# Altium PCB Loaclization_Board_PCB.PcbDoc
Units mm, origin at the board's own origin, x right, y up, seen from the top; angles counter-clockwise.
Board outline 56.61 x 83.31 mm, 4 copper layers (Top Layer, GND, 3V3, Bottom Layer), stack 0.603 mm thick; 26 components, 18 nets, 165 pads, 34 vias.
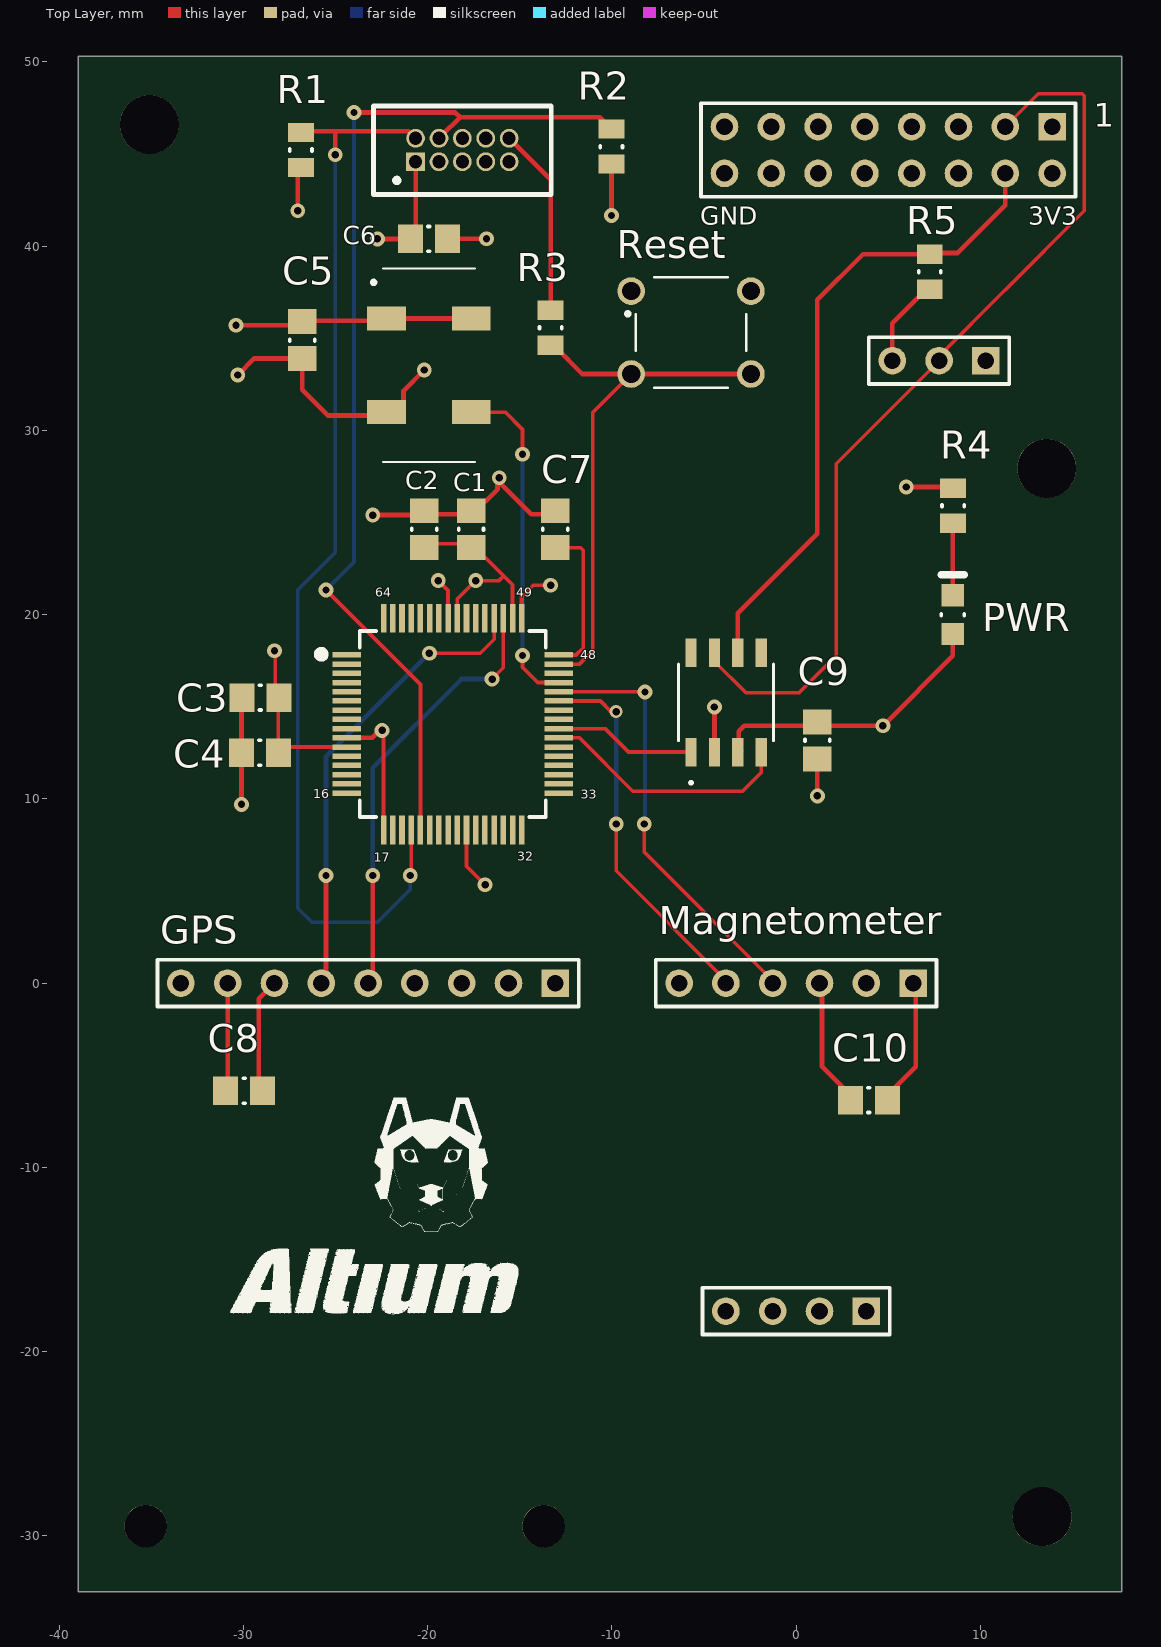
[diagram p0: Top Layer view]
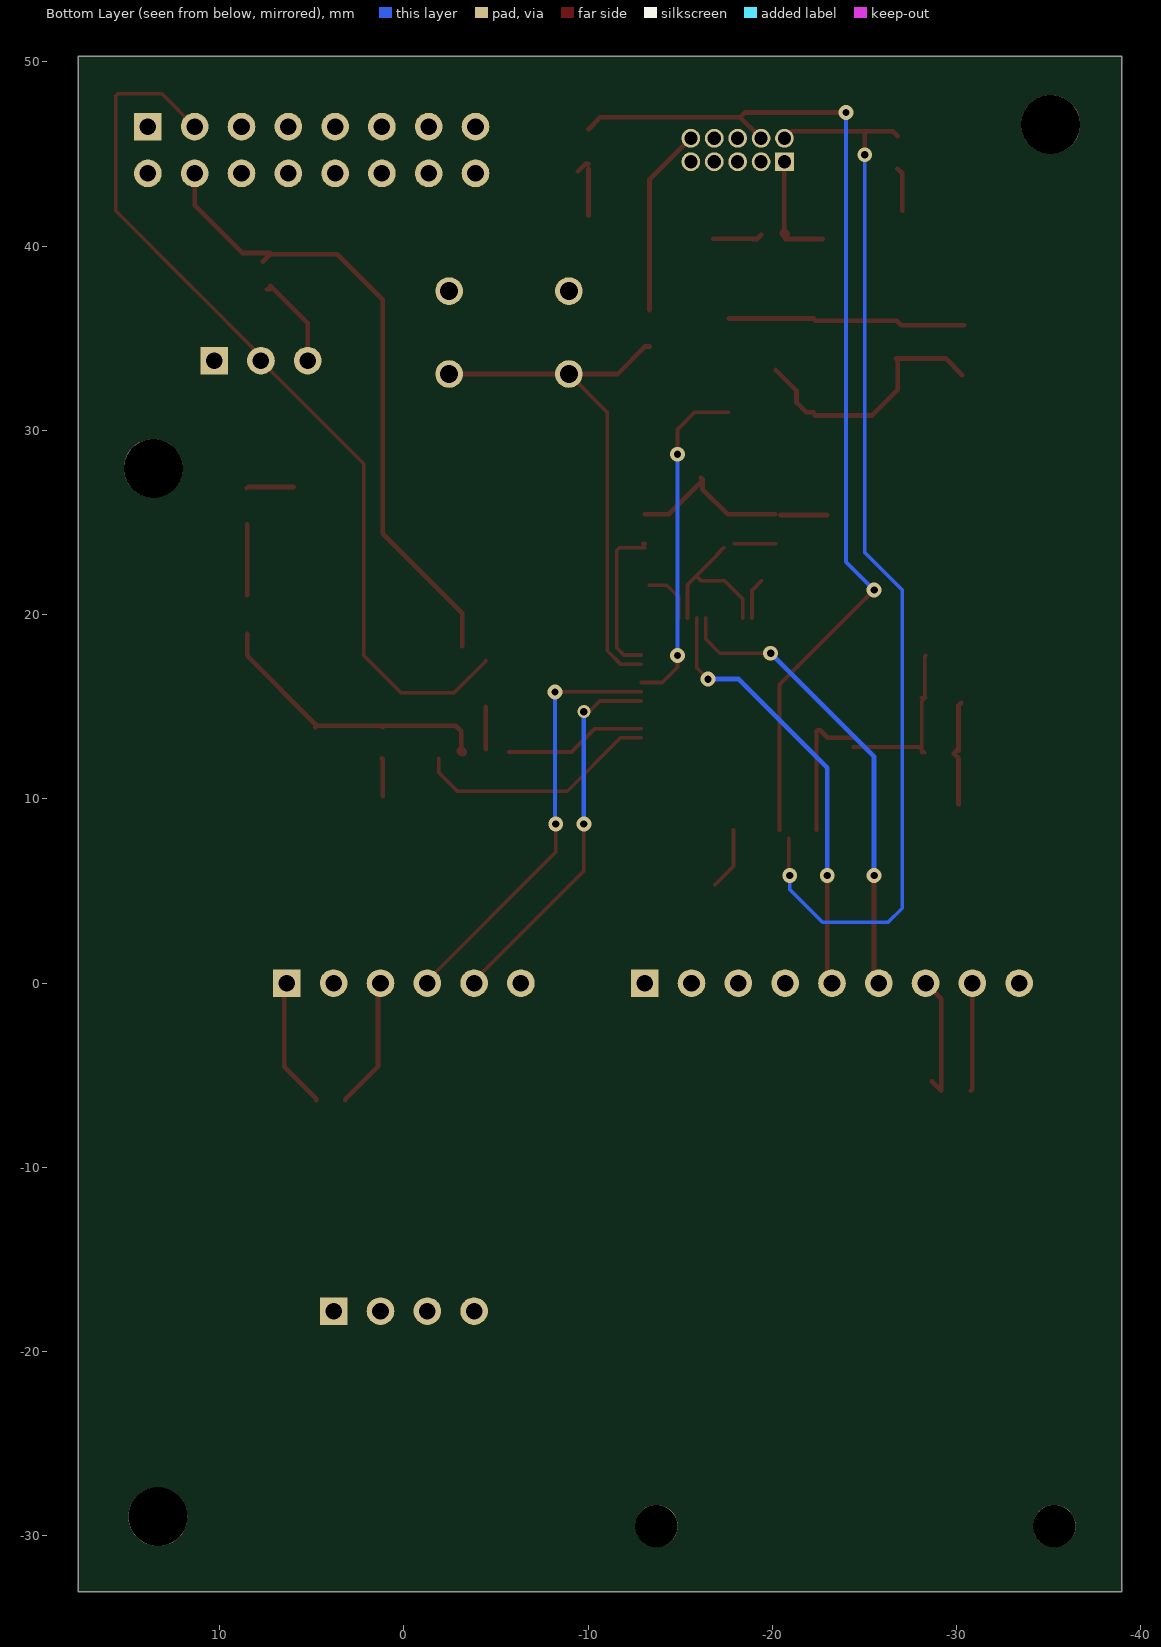
[diagram p1: Bottom Layer view, seen from below]
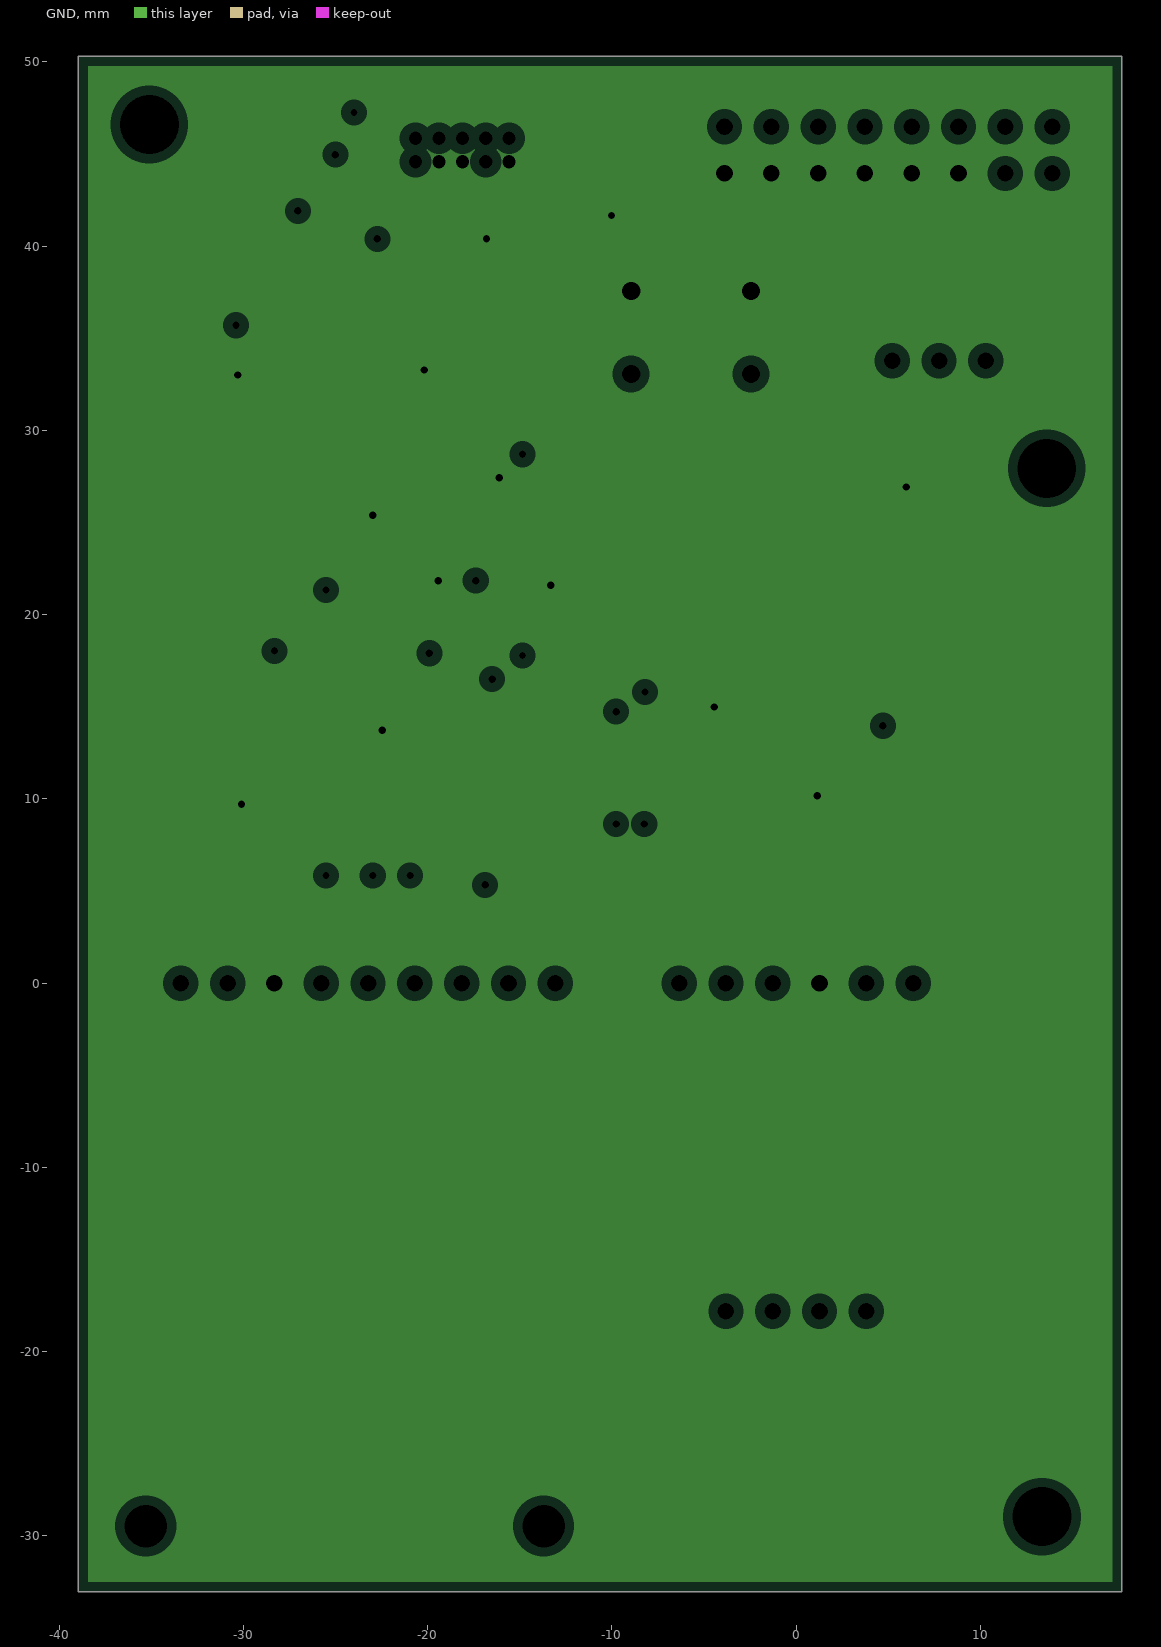
[diagram p2: GND, clearances drawn from the general rule]
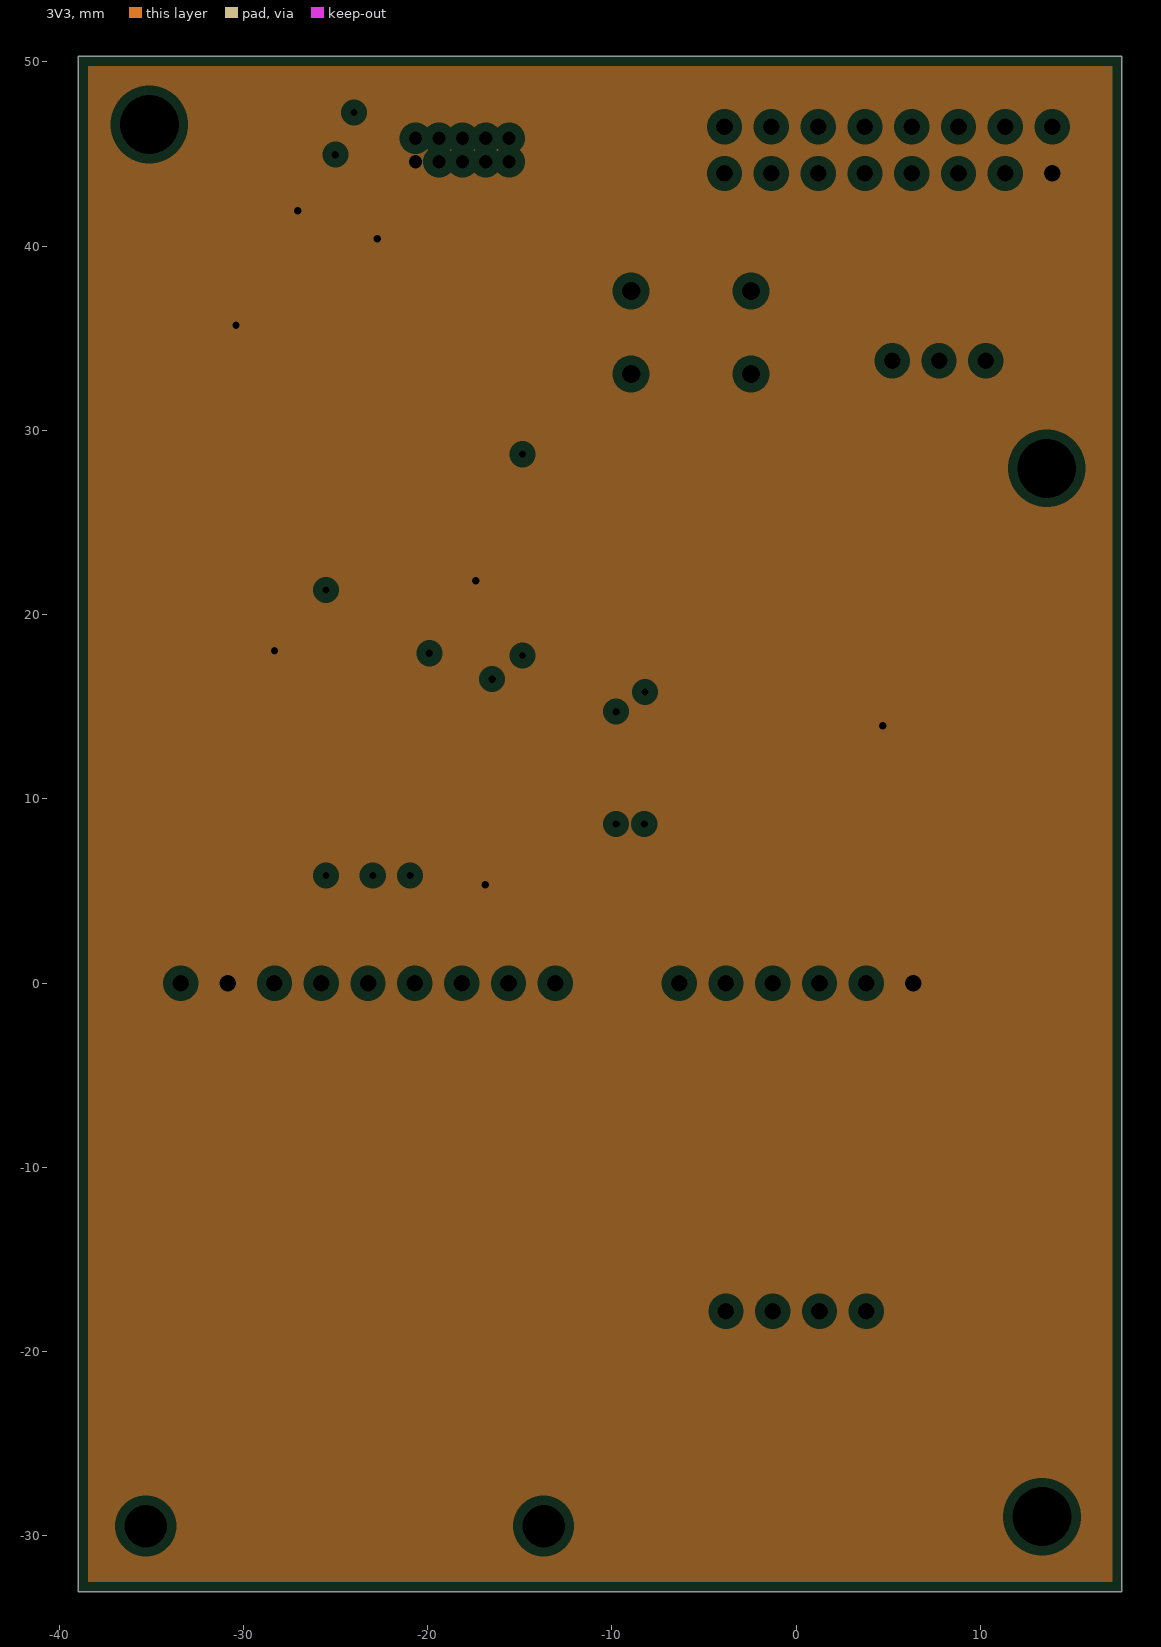
[diagram p3: 3V3, clearances drawn from the general rule]

## Layer stack, top to bottom
Top Solder: solder mask 0.0102, Solder Resist, Dk 3.5
Top Layer: signal copper 0.0356
Dielectric 2: prepreg 0.0711, PP-006, Dk 4.1
GND: plane copper 0.035, net GND
Dielectric 1: dielectric 0.32, FR-4, Dk 4.8
3V3: plane copper 0.035, net 3V3
Dielectric 3: prepreg 0.0711, PP-006, Dk 4.1
Bottom Layer: signal copper 0.0356
Bottom Solder: solder mask 0.0102, Solder Resist, Dk 3.5

## Board outline
-38.95,-33.02 17.664,-33.02 17.664,50.292 -38.95,50.292

## Design rules (kind name [scope] priority, off if disabled: settings)
BoardOutlineClearance [All] p1: gap=0.2 ignorepadtopadclearanceinfootprint=FALSE except(0.4: Arc-SplitBarrior Arc-SplitContinuation Track-SplitBarrior Track-SplitContinuation SMDPad-SplitBarrior SMDPad-SplitContinuation THPad-SplitBarrior THPad-SplitContinuation Via-SplitBarrior Via-SplitContinuation Fill-SplitBarrior Fill-SplitContinuation Poly-SplitBarrior Poly-SplitContinuation Region-SplitBarrior Region-SplitContinuation Text-SplitBarrior Text-SplitContinuation)
Clearance "Clearance Bottom Layer" [OnLayer('Bottom Layer')] p1: gap=0.203 ignorepadtopadclearanceinfootprint=TRUE except(0.254: Arc-Text Track-Text SMDPad-Text THPad-Text Via-Text Fill-Text Poly-Text Region-Text Text-Text)
Clearance "Clearance Top Layer" [OnLayer('Top Layer')] p2: gap=0.203 ignorepadtopadclearanceinfootprint=TRUE except(0.254: Arc-Text Track-Text SMDPad-Text THPad-Text Via-Text Fill-Text Poly-Text Region-Text Text-Text)
Clearance [All] p3: gap=0.2 ignorepadtopadclearanceinfootprint=FALSE except(0.089: Arc-Arc Arc-Track Arc-SMDPad Track-Track Track-SMDPad SMDPad-SMDPad; 0.127: Arc-Via Track-Via SMDPad-Via THPad-Via Via-Via; 0.254: Arc-Text Track-Text SMDPad-Text THPad-Text Via-Text Fill-Text Poly-Text Region-Text Text-Text)
HoleSize [All] p1: absolutevalues=TRUE maxlimit=6.3 minlimit=0.2 maxpercent=80.000 minpercent=20.000
MinimumAnnularRing [All] p1: minimumring=0.076
MinimumSolderMaskSliver [All] p1: minsoldermaskwidth=0.1
PlaneClearance [All] p1: clearance=0.508
PlaneConnect [All] p1: planeconnectstyle=Relief reliefexpansion=0.508 reliefentries=4 reliefconductorwidth=0.254 reliefairgap=0.254
PolygonConnect PolygonConnect_1 [All] p1: thpad.connectstyle=Relief thpad.reliefconductorwidth=0.508 thpad.reliefentries=4 thpad.polygonreliefangle="90 Angle" thpad.airgapwidth=0.254 smdpad.connectstyle=Relief smdpad.reliefconductorwidth=0.508 smdpad.reliefentries=4 smdpad.polygonreliefangle="90 Angle" smdpad.airgapwidth=0.254 via.connectstyle=Direct via.reliefconductorwidth=0.508 via.reliefentries=4 via.polygonreliefangle="90 Angle" via.airgapwidth=0.254
RoutingCorners [All] p1: cornerstyle=Round minsetback=2.54 maxsetback=2.54
RoutingVias [All] p1: holewidth=0.5 width=1 viastyle="Through Hole" minholewidth=0.2 minwidth=0.45 maxholewidth=1 maxwidth=2
SilkToSilkClearance [All] p1: silktosilkclearance=0.1
SilkToSolderMaskClearance [IsPad] p1: minsilkscreentomaskgap=0.1 clearancetoexposedcopper=TRUE
SolderMaskExpansion [All] p1: expansion=0.102
Width [All] p1: maxlimit=2.54 minlimit=0.089 preferedwidth=0.381
23 further rules are at their usual default settings.

## Classes and differential pairs
component class PSoc: C1 C2 C3 C4 C6 C7 R1 R2 R3 R4 Reset

## Components (designator, comment, footprint, x,y, rotation, side; value= is the part's Value field where it differs from the comment)
C1 "1uF" CAPC0805(2012)100_M -17.642,24.638 r90 top value=33pF
C2 "0.1uF" CAPC0805(2012)100_M -20.182,24.638 r270 top value=33pF
C3 "1uF" CAPC0805(2012)100_M -29.072,15.494 r180 top value=33pF
C4 "0.1uF" CAPC0805(2012)100_M -29.1,12.5 r0 top value=33pF
C5 "0.1uF" CAPC0805(2012)100_M -26.8,34.9 r90 top value=33pF
C6 "0.1uF" CAPC0805(2012)100_M -19.928,40.386 r180 top value=33pF
C7 "0.1uF" CAPC0805(2012)100_M -13.07,24.638 r90 top value=33pF
C8 "0.1uF" CAPC0805(2012)100_M -29.961,-5.842 r180 top value=33pF
C9 "0.1uF" CAPC0805(2012)100_M 1.154,13.17 r90 top value=33pF
C10 "0.1uF" CAPC0805(2012)100_M 3.948,-6.35 r0 top value=33pF
CAN_Termination "" HDR1X3 10.298,33.782 r180 top
CAN_Transceiver "Part Number: TCAN332DR" D0008A_N -3.799,15.24 r90 top value=Value
GPS "" HDR1X9 -13.07,0 r180 top locked
J? "SAMTEC-FTSH-105-01-X-D" SAMTEC-FTSH-105-01-X-D -23.072,42.246 r0 top
Magnetometer "" HDR1X6 6.35,0 r180 top locked
OSC "SG-636PCW_50.0000MC3__ROHS" SG-636 -19.928,33.528 r270 top
Power_Connector "Header 8X2" HDR2X8 13.892,46.482 r180 top
PSoC "CY8C4248AZI-L485" TQFP50P1200X1200X160-64N -18.638,14.062 r0 top
PWR "LTST-C170KSKT" LTST-C170KSKT_V 8.5,20 r90 top
R1 "47K" RESC0805(2012)_N -26.875,45.212 r270 top value="120.00 Ohm"
R2 "47K" RESC0805(2012)_N -10.022,45.4 r90 top value="120.00 Ohm"
R3 "100R" RESC0805(2012)_N -13.324,35.56 r270 top value="120.00 Ohm"
R4 "" RESC0805(2012)_N 8.52,25.908 r270 top value="120.00 Ohm"
R5 "120R" RESC0805(2012)_N 7.25,38.608 r270 top value="120.00 Ohm"
Reset "1825910-7" "Switch 6mm 24V (NO)" -5.704,35.306 r0 top
? "" HDR1X4 3.81,-17.8 r180 top locked

## Footprints (in the part's own frame and the unit in brackets; to place one, negate y for a bottom-side part, rotate by r counter-clockwise, add the part's x,y. Pads: shape width x height; smd on the part's side, far side on the other; paste and mask are expansions set on the pad)
CAPC0805(2012)100_M [mm] "Chip Capacitor, Body 2.0x1.2mm, Height 1.0mm, IPC Low Density"
  rect 1.35x1.55 smd: 1(-1,0) 2(1,0)
  silkscreen extent -0.05,-0.67 0.05,0.67, body extent -1.1,-0.72 1.1,0.72, height 1
D0008A_N [mil]
  rect 61x24 smd paste+0 mask+3: 1(-106.3,75) 2(-106.3,25) 3(-106.3,-25) 4(-106.3,-75) 5(106.3,-75) 6(106.3,-25) 7(106.3,25) 8(106.3,75)
  silkscreen extent -175,-102 82,102, body extent 0,0 10,10, height 10
HDR1X3 [mm] "Connector; Header; 3 Position"
  rect 1.5x1.5 hole 0.9: 1(0,0)
  round 1.5 hole 0.9: 2(2.54,0) 3(5.08,0)
  silkscreen extent -1.27,-1.27 6.35,1.27
HDR1X4 [mm] "Connector; Header; 4 Position"
  rect 1.5x1.5 hole 0.9: 1(0,0)
  round 1.5 hole 0.9: 2(2.54,0) 3(5.08,0) 4(7.62,0)
  silkscreen extent -1.27,-1.27 8.89,1.27
HDR1X6 [mm] "Connector; Header; 6 Position"
  rect 1.5x1.5 hole 0.9: 1(0,0)
  round 1.5 hole 0.9: 2(2.54,0) 3(5.08,0) 4(7.62,0) 5(10.16,0) 6(12.7,0)
  silkscreen extent -1.27,-1.27 13.97,1.27
HDR1X9 [mm] "Connector; Header; 9 Position"
  rect 1.5x1.5 hole 0.9: 1(0,0)
  round 1.5 hole 0.9: 2(2.54,0) 3(5.08,0) 4(7.62,0) 5(10.16,0) 6(12.7,0) 7(15.24,0) 8(17.78,0) 9(20.32,0)
  silkscreen extent -1.27,-1.27 21.59,1.27
HDR2X8 [mm] "Connector; Header; 8x2 Position"
  rect 1.5x1.5 hole 0.9: 1(0,0)
  round 1.5 hole 0.9: 2(0,2.54) 3(2.54,0) 4(2.54,2.54) 5(5.08,0) 6(5.08,2.54) 7(7.62,0) 8(7.62,2.54) 9(10.16,0) 10(10.16,2.54) 11(12.7,0) 12(12.7,2.54) 13(15.24,0) 14(15.24,2.54) 15(17.78,0) 16(17.78,2.54)
  silkscreen extent -1.27,-1.27 19.05,3.81
LTST-C170KSKT_V [mm] "SMD, 2-Leads, Body 2x1.25mm"
  rect 1.2x1.2 smd: 1(-1.05,0) 2(1.05,0)
  silkscreen extent -0.05,-0.63 2.16,0.64, body extent -1,-0.63 1,0.63, height 1.2
RESC0805(2012)_N [mm] "Chip Resistor, Body 2.0x1.3mm, IPC Medium Density"
  rect 1.05x1.4 smd: 1(-0.95,0) 2(0.95,0)
  silkscreen extent -0.05,-0.6 0.05,0.6, body extent -1.1,-0.67 1.1,0.68, height 0.7
SAMTEC-FTSH-105-01-X-D [mil]
  rect 40x40 hole 28 mask+3: 1(95.28,91.77)
  round 40 hole 28 mask+3: 2(95.28,141.77) 3(145.28,91.77) 4(145.28,141.77) 5(195.28,91.77) 6(195.28,141.77) 7(245.28,91.77) 8(245.28,141.77) 9(295.28,91.77) 10(295.28,141.77)
  silkscreen extent 5,22 385,211
SG-636 [mm]
  rect 1.3x2.1 smd: 1(-2.54,-2.3) 2(2.54,-2.3) 3(2.54,2.3) 4(-2.54,2.3)
  silkscreen extent -5.25,-3.1 5.25,2.5
"Switch 6mm 24V (NO)" [mm]
  round 1.498 hole 0.99: 1(-3.25,2.25) 2(3.25,2.25) 3(-3.25,-2.25) 4(3.25,-2.25)
  silkscreen extent -3.53,-3 3,3
TQFP50P1200X1200X160-64N [mm]
  rect 1.55x0.3 smd mask+0: 1(-5.75,3.75) 2(-5.75,3.25) 3(-5.75,2.75) 4(-5.75,2.25) 5(-5.75,1.75) 6(-5.75,1.25) 7(-5.75,0.75) 8(-5.75,0.25) 9(-5.75,-0.25) 10(-5.75,-0.75) 11(-5.75,-1.25) 12(-5.75,-1.75) 13(-5.75,-2.25) 14(-5.75,-2.75) 15(-5.75,-3.25) 16(-5.75,-3.75) 33(5.75,-3.75) 34(5.75,-3.25) 35(5.75,-2.75) 36(5.75,-2.25) 37(5.75,-1.75) 38(5.75,-1.25) 39(5.75,-0.75) 40(5.75,-0.25) 41(5.75,0.25) 42(5.75,0.75) 43(5.75,1.25) 44(5.75,1.75) 45(5.75,2.25) 46(5.75,2.75) 47(5.75,3.25) 48(5.75,3.75)
  rect 0.3x1.55 smd mask+0: 17(-3.75,-5.75) 18(-3.25,-5.75) 19(-2.75,-5.75) 20(-2.25,-5.75) 21(-1.75,-5.75) 22(-1.25,-5.75) 23(-0.75,-5.75) 24(-0.25,-5.75) 25(0.25,-5.75) 26(0.75,-5.75) 27(1.25,-5.75) 28(1.75,-5.75) 29(2.25,-5.75) 30(2.75,-5.75) 31(3.25,-5.75) 32(3.75,-5.75) 49(3.75,5.75) 50(3.25,5.75) 51(2.75,5.75) 52(2.25,5.75) 53(1.75,5.75) 54(1.25,5.75) 55(0.75,5.75) 56(0.25,5.75) 57(-0.25,5.75) 58(-0.75,5.75) 59(-1.25,5.75) 60(-1.75,5.75) 61(-2.25,5.75) 62(-2.75,5.75) 63(-3.25,5.75) 64(-3.75,5.75)
  silkscreen extent -7.33,-5.05 5.05,5.05, body extent -5.12,-5.12 5.12,5.12, height 1.6

## Part data
C1 C2 C3 C4 C5 C6 C7 C8 C9 C10: library part CMP-1036-01451-1, "CAP 33pF 200V ±1% 0805 (2012 Metric) Thickness 1mm SMD", Case-EIA=0805, Case-Metric=2012, Rated Voltage="200 V", Tolerance=±1%, Max Thickness="1 mm", Technology=SMT
CAN_Termination: library part "Header 3", "Header, 3-Pin", LatestRevisionDate=17-Jul-2002, LatestRevisionNote="Re-released for DXP Platform.", Publisher="Altium Limited"
CAN_Transceiver: library part TCAN332DR, "No Description Available", Built_By=Texas_Instrument_Team, Copyright="Copyright (C) 2018 Accelerated Designs. All rights reserved", Manufacturer_Part_Number=TCAN332DR, RefDes=RefDes, Type=DEV, Vendor="Texas Instruments"
GPS: library part "Header 9", "Header, 9-Pin", LatestRevisionDate=17-Jul-2002, LatestRevisionNote="Re-released for DXP Platform.", Publisher="Altium Limited"
Magnetometer: library part "Header 6", "Header, 6-Pin", LatestRevisionDate=17-Jul-2002, LatestRevisionNote="Re-released for DXP Platform.", Publisher="Altium Limited"
OSC: library part SG-636, "Standard Clock Oscillators 50MHz 3.3Volt 100ppm -20C +70C", Arrow Part Number="SG-636PCW 50.0000MC3: ROHS", Manufacturer_Name="Epson Timing", Datasheet Link=http://www.mouser.com/ds/2/137/G-636PCE_en-1003252.pdf, Manufacturer_Part_Number="SG-636PCW 50.0000MC3: ROHS"
Power_Connector: "Header, 8-Pin, Dual row", LatestRevisionDate=17-Jul-2002, LatestRevisionNote="Re-released for DXP Platform.", Publisher="Altium Limited"
PWR: library part CMP-2000-06621-1, "LED Yellow, 75 mW, 80 mA, -55 to 85 degC, 2-Pin SMD, RoHS, Tape and Reel", Emitting color=Amber, Forward Current=30mA, Forward Voltage=2.4V, Manufacturer=Lite-On, Operating Temperature Classification=Industrial, Operating Temp Range=-55Cto85C, Package Description="2-Pin Surface Mount Device, Body 2 x 1.25 mm", Package Reference=C170KSKT, Package Type=ChipLed, Power Dissipation=75W, Reverse Voltage=5V, Test Current (It)=20mA, Chip Material=AlGaInP, Datasheet URL=http://optoelectronics.liteon.com/upload/download/DS-22-99-0188/S_110_LTST-C170KSKT.pdf, Datasheet Version="Rev. H, 04/2014", DELETED=Compliant, Dominant Wave Length=587nm, High Brightness=Yes, Lens Dimensions=1.4x1.25x0.6mm, Luminous Intensity=112mcd, Lum Intensity=112mcd, Main Category=ChipLED, Manufacturer URL=http://www.us.liteon.com/, Mounting=SurfaceMount, Mounting Technology=SurfaceMount, Number of  Elements=1, Packaging=TapeandReel, Peak Wavelength=588nm, Pin Count=2, Product Depth (mm)=1.25mm, Product Height (mm)=1.1mm, Product Length (mm)=2mm, Rad Hardened=No, Shape Type=Rectangular, Type=Uni-Color, Viewing Angle=130deg
R1 R2 R3 R4 R5: library part "120R 5% 0805", "120R 0.125W 5% 0805 (2012 Metric)  SMD", Case-EIA=0805, Case-Metric=2012, Power="0.125 W", Tolerance="5 %", Technology=SMT
Reset: library part "Switch 6mm 24V (NO)", "FSM4JAH=6MM TACT SWITCH, HIGH TEMP", Contact_Current_Rating="50 mA", Package=None, Configuration_Pole-Throw="Single Pole - Single Throw", Digi-Key_Part_Number=450-1804-ND, Digi-Key_Purchase_URL=https://www.digikey.com/product-detail/en/te-connectivity-alcoswitch-switches/1825910-7/450-1804-ND/1731414?utm_source=snapeda&utm_medium=aggregator&utm_campaign=symbol, EU_RoHS_Compliance=Compliant, MF="TE Connectivity", MP=1825910-7, SnapEDA_Link=https://www.snapeda.com/parts/1825910-7/TE%20Connectivity%20ALCOSWITCH%20Switches/view-part/?ref=snap, TE_purchase_URL=https://www.te.com/usa-en/product-1825910-7.html?te_bu=Cor&te_type=disp&te_campaign=seda_glo_cor-seda-global-disp-prtnr-fy19-seda-model-bom-cta_sma-317_1&elqCampaignId=32493
?: library part "Header 4", "Header, 4-Pin", LatestRevisionDate=17-Jul-2002, LatestRevisionNote="Re-released for DXP Platform.", Publisher="Altium Limited"
PSoC: Part_Number=CY8C4248AZI-L485

## Free pads (board coordinates)
  round 2.3 hole 2.3 unplated: ""(-35.295,-29.464) ""(-13.705,-29.464)
  round 3.2 hole 3.2 unplated: ""(-35.1,46.6) ""(13.346,-28.956) ""(13.6,27.94)

## Via types
v1: diameter 0.8, hole 0.4, Top Layer to Bottom Layer, 13 vias
v2: diameter 0.8, hole 0.4, Top Layer to GND, 13 vias
v3: diameter 0.8, hole 0.4, Top Layer to 3V3, 7 vias
v4: diameter 0.711, hole 0.4, Top Layer to Bottom Layer, 1 vias

## Nets (pads, with @x,y where several pads share a name; then routed paths per layer and width w, separated by ;. In a path a pad name is that pad's centre, name@x,y a point inside that pad or via, vN(x,y) a via of type N, cw(c..) or ccw(c..) an arc to the next point about the centre after c; other vN are vias at no path point)
3V3: C1.1 C2.2 C3.1 C4.2 C5.2 C6.2 C8.2 C9.2 C10.2 CAN_Transceiver.3 GPS.8 J?.1 Magnetometer.1 OSC.1 OSC.4 Power_Connector.2 PSoC.11 PSoC.26 PSoC.50 PSoC.56 PWR.1 R1.2 | length 73.8
  Top Layer w0.2: C3.1@-28.31,15.494 C3.1@-28.272,15.456 ; v3@-28.31,17.78 -28.272,17.742 C3.1@-28.272,15.494 ; C4.2@-28.272,12.5 C4.2@-28.1,12.672 ; C4.2 C4.2@-28.1,12.672 ; C3.1 -28.234,15.494 C3.1@-28.272,15.456 ; PSoC.11 -27.96,12.812 C4.2@-28.1,12.672 ; C2.2@-20.182,23.838 C1.1@-17.934,23.838 ; PSoC.56 -18.388,20.844 v3(-17.388,21.844) -16.118,21.844 -15.864,22.098 ; PSoC.26 -17.888,6.342 v3(-16.88,5.334) ; C1.1@-17.388,23.622 -17.351,23.622 -17.017,23.288 -17.017,23.251 -15.864,22.098 ; PSoC.50 -15.388,21.622 -15.864,22.098 ; C3.1@-28.272,15.456 -28.1,15.284 C4.2@-28.1,12.672
  Top Layer w0.254: C8.2@-30.761,-5.842 -30.85,-5.753 -30.85,-0.254 GPS.8@-30.596,0 ; v3(-30.4,35.7) -27,35.7 C5.2 -26.752,35.948 -22.348,35.948 OSC.1 OSC.4@-17.642,36.068 ; v3(-27.04,41.91) -27.04,43.942 R1.2@-26.786,44.196 ; v3(-22.722,40.386) C6.2 C6.2@-20.69,40.386 ; C6.2@-20.64,40.69 J?.1@-20.64,44.565 ; CAN_Transceiver.3@-3.109,12.595 -3.109,13.677 -2.816,13.97 v3(4.71,13.97) ; C9.2@1.154,13.894 C9.2@1.154,13.97 ; C10.2@4.748,-6.35 4.748,-6.275 6.488,-4.535 Magnetometer.1@6.488,-0.254 ; v3@4.8,13.9 4.8,14.06 8.5,17.76 PWR.1
  Top Layer w0.5: C6.2@-20.69,40.64 C6.2@-20.64,40.69 ; J?.1 J?.1@-20.64,44.565 ; CAN_Transceiver.3 CAN_Transceiver.3@-3.109,12.595
  other v3: -28.31,18.034
EXT_CLK: OSC.3 PSoC.45 | length 18.4
  Top Layer w0.2: OSC.3 -15.787,30.988 -14.848,30.049 v1(-14.848,28.702) ; v1(-14.848,17.78) -14.848,17.143 -14.017,16.312 PSoC.45
  Bottom Layer w0.2: v1(-14.848,17.78) v1(-14.848,28.702)
GND: C1.2 C2.1 C3.2 C4.1 C5.1 C6.1 C7.2 C8.1 C9.1 C10.1 CAN_Transceiver.2 GPS.7 J?.3 J?.5 J?.9 Magnetometer.3 OSC.2 Power_Connector.6 Power_Connector.8 Power_Connector.10 Power_Connector.12 Power_Connector.14 Power_Connector.16 PSoC.10 PSoC.17 PSoC.49 PSoC.57 R2.1 R4.1 Reset.1 Reset.2 | length 71
  Top Layer w0.2: PSoC.17 v2@-22.388,13.636 ; v2(-19.42,21.844) -18.888,21.312 PSoC.57 ; -14.888,20.968 -14.266,21.59 v2(-13.324,21.59)
  Top Layer w0.254: v2(-30.3,33) -29.4,33.9 C5.1 ; C3.2@-30.244,15.222 -30.1,15.078 -30.1,12.628 -30.084,12.612 -29.984,12.612 -29.834,12.462 -30.1,12.196 v2(-30.1,9.7) ; C8.1@-28.638,-5.319 -29.161,-5.842 -29.161,-0.851 -28.564,-0.254 GPS.7@-28.31,-0.254 ; GPS.7@-28.056,-0.083 GPS.7@-28.056,0 ; C5.1@-26.7,33.9 C5.1 ; PSoC.10 -22.993,13.312 -22.589,13.716 v2(-22.468,13.716) v2@-22.388,13.636 ; -23.7,30.8 -25.4,30.8 -26.8,32.2 C5.1 ; -23.659,30.8 OSC.2@-22.3,30.8 ; v2(-22.976,25.4) C2.1@-20.436,25.4 ; OSC.2 -21.828,30.988 -21.305,31.511 -21.305,32.151 v2(-20.182,33.274) ; C2.1@-20.144,25.438 -17.567,25.438 -16.203,26.802 -16.203,27.347 v2(-16.118,27.432) ; C6.1@-19.382,40.602 -19.166,40.386 C6.1 -18.914,40.4 v2(-16.8,40.4) ; v2@-16.118,27.178 -14.378,25.438 C7.2@-13.07,25.438 ; PSoC.49 -14.888,20.968 ; v2(-10.022,41.656) R2.1@-10.022,44.196 ; R2.1 -9.847,44.45 R2.1@-9.449,44.052 ; CAN_Transceiver.2@-4.434,12.7 v2(-4.434,14.986) ; v2(1.154,10.16) 1.154,12.154 C9.1@1.2,12.2 ; Magnetometer.3@1.408,0 1.408,-4.535 3.186,-6.313 C10.1@3.186,-6.35 ; v2(5.98,26.924) 8.454,26.924 R4.1
GPS_RX: GPS.6 PSoC.52 | length 25.3
  Top Layer w0.2: v1(-19.9,17.9) -17.144,17.9 -16.388,18.656 PSoC.52
  Top Layer w0.254: GPS.6 -25.516,0.254 v1(-25.516,5.842)
  Bottom Layer w0.254: v1(-25.516,5.842) -25.516,12.284 v1(-19.9,17.9)
GPS_TX: GPS.5 PSoC.51 | length 23.8
  Top Layer w0.2: v1(-16.5,16.5) -15.888,17.112 PSoC.51
  Top Layer w0.254: GPS.5 -22.976,0.254 v1(-22.976,5.842)
  Bottom Layer w0.254: v1(-22.976,5.842) -22.976,11.684 -18.16,16.5 v1(-16.5,16.5)
NetC7_1: C7.1 PSoC.48 | length 8.4
  Top Layer w0.2: C7.1@-13.07,23.622 -11.695,23.622 -11.546,23.473 -11.546,18.206 -11.94,17.812 PSoC.48
  Top Layer w0.254: C7.1@-13.07,23.838 C7.1@-12.995,23.838
NetCAN_Termination_2: CAN_Termination.2 CAN_Transceiver.7 Power_Connector.3 | length 49.2
  Top Layer w0.19: CAN_Transceiver.7@-4.434,17.526 -4.434,17.47 -2.712,15.748 0.138,15.748 2.17,17.78 2.17,28.194 CAN_Termination.2 7.758,34.036 11.314,37.592 ; 11.333,37.611 15.632,41.91 15.632,48.149 15.521,48.26 13.13,48.26 Power_Connector.3
NetCAN_Termination_3: CAN_Termination.3 R5.2 | length 5.1
  Top Layer w0.254: CAN_Termination.3 5.218,35.801 7.25,37.833 R5.2@7.25,37.846 ; R5.2 R5.2@7.425,37.658
NetCAN_Transceiver_1: CAN_Transceiver.1 PSoC.40 | length 7.7
  Top Layer w0.2: PSoC.40 -10.372,13.812 -9.1,12.54 CAN_Transceiver.1
NetCAN_Transceiver_4: CAN_Transceiver.4 PSoC.39 | length 13.4
  Top Layer w0.2: PSoC.39 -11.759,13.312 -8.861,10.414 -2.91,10.414 -1.894,11.43 CAN_Transceiver.4@-1.894,12.192
NetCAN_Transceiver_6: CAN_Transceiver.6 Power_Connector.4 R5.1 | length 35.2
  Top Layer w0.254: CAN_Transceiver.6@-3.164,18.288 -3.164,20.066 1.154,24.384 1.154,37.084 3.628,39.558 R5.1 R5.1@7.648,39.16 ; R5.1@7.25,39.624 8.774,39.624 11.352,42.202 Power_Connector.4
NetJ?_10: J?.10 R3.1 | length 10.3
  Top Layer w0.254: J?.10@-15.356,45.974 -15.356,45.631 -13.324,43.599 R3.1
NetMagnetometer_4: Magnetometer.4 PSoC.44 | length 23.5
  Top Layer w0.2: PSoC.44 -12.882,15.806 -8.206,15.806 v1(-8.2,15.8) ; v1(-8.244,8.636) -8.244,7.112 Magnetometer.4@-1.132,0
  Bottom Layer w0.2: v1(-8.244,8.636) -8.2,8.68 v1(-8.2,15.8)
NetMagnetometer_5: Magnetometer.5 PSoC.43 | length 20.6
  Top Layer w0.2: PSoC.43 -10.623,15.312 v4@-10.043,14.732 ; v1(-9.768,8.636) -9.768,6.096 Magnetometer.5@-3.672,0
  Top Layer w0.254: v4@-10.043,14.732 v4(-9.768,14.732)
  Bottom Layer w0.254: v1(-9.768,8.636) v4(-9.768,14.732)
NetPWR_2: PWR.2 R4.2 | length 3.8
  Top Layer w0.254: PWR.2 R4.2@8.5,24.9
RES: PSoC.47 R3.2 Reset.3 Reset.4 | length 29.5
  Top Layer w0.2: PSoC.47 -11.76,17.312 -11.038,18.034 -11.038,30.972 Reset.3
  Top Layer w0.254: R3.2@-13.324,34.544 -13.083,34.544 -11.595,33.056 Reset.3 Reset.4
SWD_CLK: J?.4 PSoC.21 R2.2 | length 57.6
  Top Layer w0.2: v1(-25.516,21.336) -20.388,16.208 PSoC.21
  Top Layer w0.254: v1(-23.992,47.244) -18.493,47.244 -18.239,46.99 ; J?.4@-19.42,45.974 -19.255,45.974 -18.239,46.99 ; R2.2 -10.662,46.99 -18.239,46.99
  Bottom Layer w0.2: v1(-25.516,21.336) -23.992,22.86 v1(-23.992,47.244)
SWD_DATA: J?.2 PSoC.20 R1.1 | length 59.4
  Top Layer w0.19: v1(-20.944,5.842) -20.889,5.897 PSoC.20@-20.889,7.874
  Top Layer w0.254: R1.1@-26.786,45.974 -26.532,46.228 -25.008,46.228 ; v1(-25.008,44.958) -25.008,46.228 ; J?.2 -21.033,46.228 -25.008,46.228
  Bottom Layer w0.2: v1(-25.008,44.958) -25.008,23.368 -27.04,21.336 -27.04,4.064 -26.278,3.302 -22.722,3.302 -20.944,5.08 v1(-20.944,5.842)
pads on no net: ?.1 ?.2 ?.3 ?.4 CAN_Termination.1 CAN_Transceiver.5 CAN_Transceiver.8 GPS.1 GPS.2 GPS.3 GPS.4 GPS.9 J?.6 J?.7 J?.8 Magnetometer.2 Magnetometer.6 Power_Connector.1 Power_Connector.5 Power_Connector.7 Power_Connector.9 Power_Connector.11 Power_Connector.13 Power_Connector.15 PSoC.1 PSoC.2 PSoC.3 PSoC.4 PSoC.5 PSoC.6 PSoC.7 PSoC.8 PSoC.9 PSoC.12 PSoC.13 PSoC.14 PSoC.15 PSoC.16 PSoC.18 PSoC.19 PSoC.22 PSoC.23 PSoC.24 PSoC.25 PSoC.27 PSoC.28 PSoC.29 PSoC.30 PSoC.31 PSoC.32 PSoC.33 PSoC.34 PSoC.35 PSoC.36 PSoC.37 PSoC.38 PSoC.41 PSoC.42 PSoC.46 PSoC.53 PSoC.54 PSoC.55 PSoC.58 PSoC.59 PSoC.60 PSoC.61 PSoC.62 PSoC.63 PSoC.64

## Polygon pours and split planes (outlines as drawn)
GND on GND (split plane): 17.154,49.782 17.154,-32.51 -38.44,-32.51 -38.44,49.782
3V3 on 3V3 (split plane): 17.154,49.782 17.154,-32.51 -38.44,-32.51 -38.44,49.782

## Silkscreen, mask and mechanical layers (free items; w line width, h text height)
Top Overlay:
  drawing of 13 lines, arcs and shapes, not listed

## Text inside footprints (layer, text, board x,y; h text height)
Power_Connector: Top Overlay "3V3" at 12.584,41.148 h1; Top Overlay "GND" at -5.196,41.148 h1; Top Overlay "1" at 16.14,46.482 h1.27
PSoC: Top Overlay "16" at -26.198,10.027 h0.5; Top Overlay "17" at -22.931,6.594 h0.5; Top Overlay "32" at -15.133,6.645 h0.5; Top Overlay "33" at -11.678,9.998 h0.5; Top Overlay "48" at -11.704,17.567 h0.5; Top Overlay "49" at -15.184,20.971 h0.5; Top Overlay "64" at -22.829,20.971 h0.5